# EAGLE board Soleful-v1.1 (EAGLE 7.7.0)
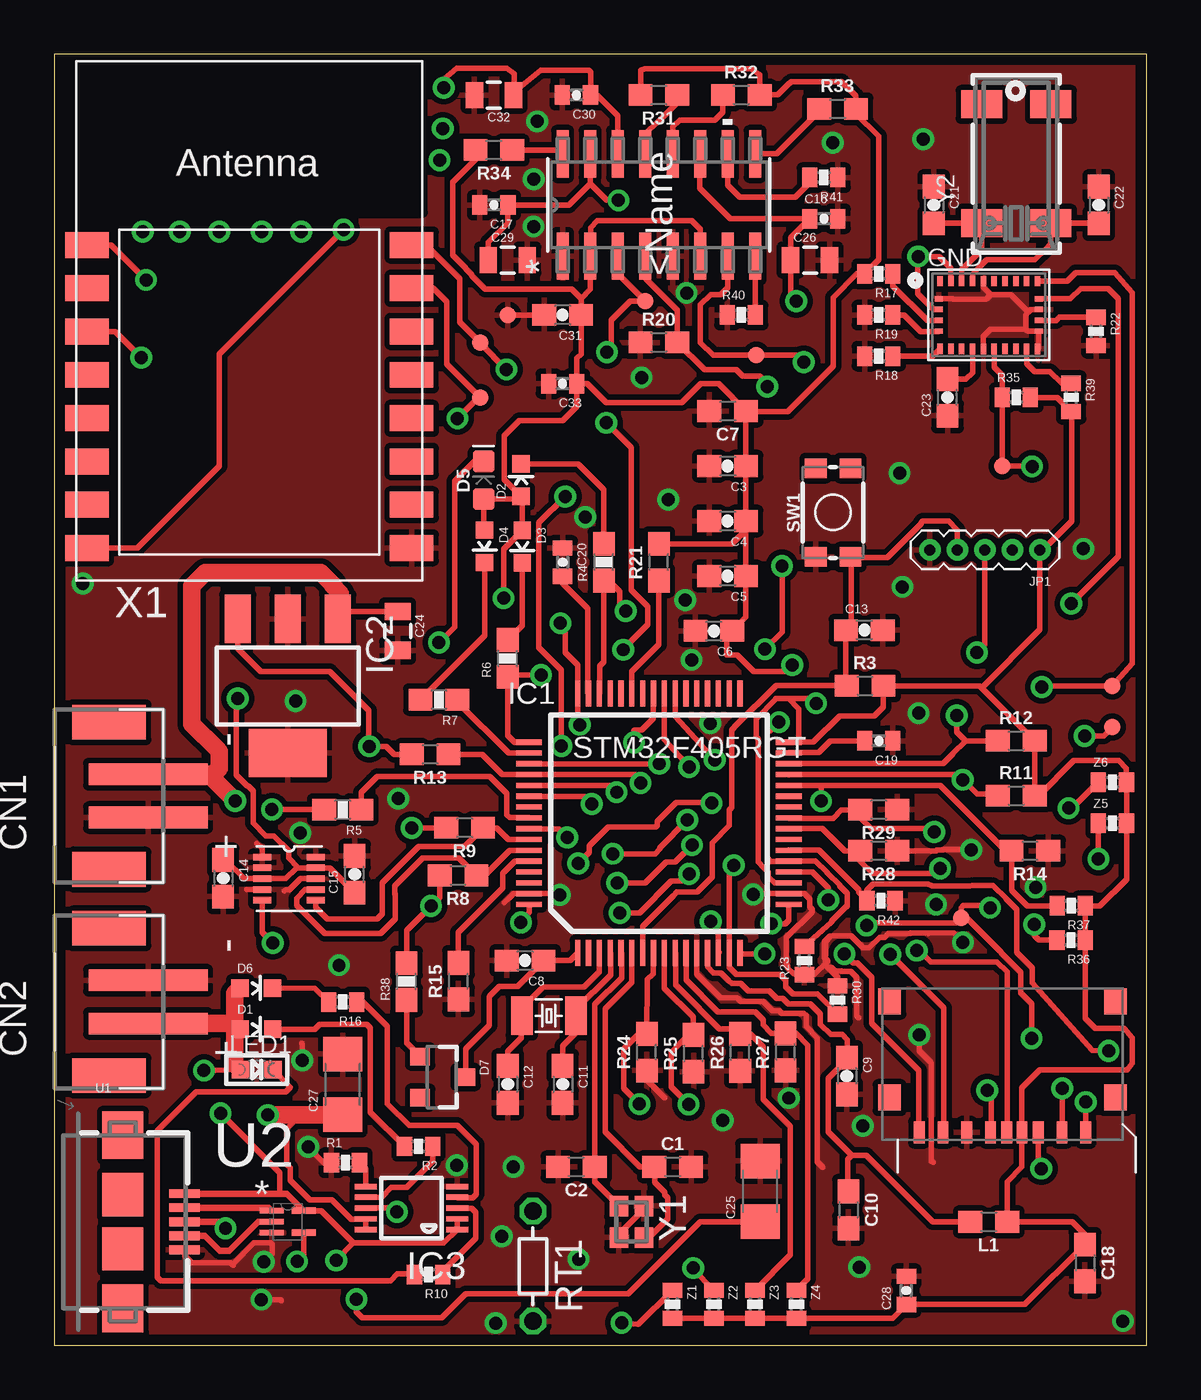
[diagram p0: board, top side]
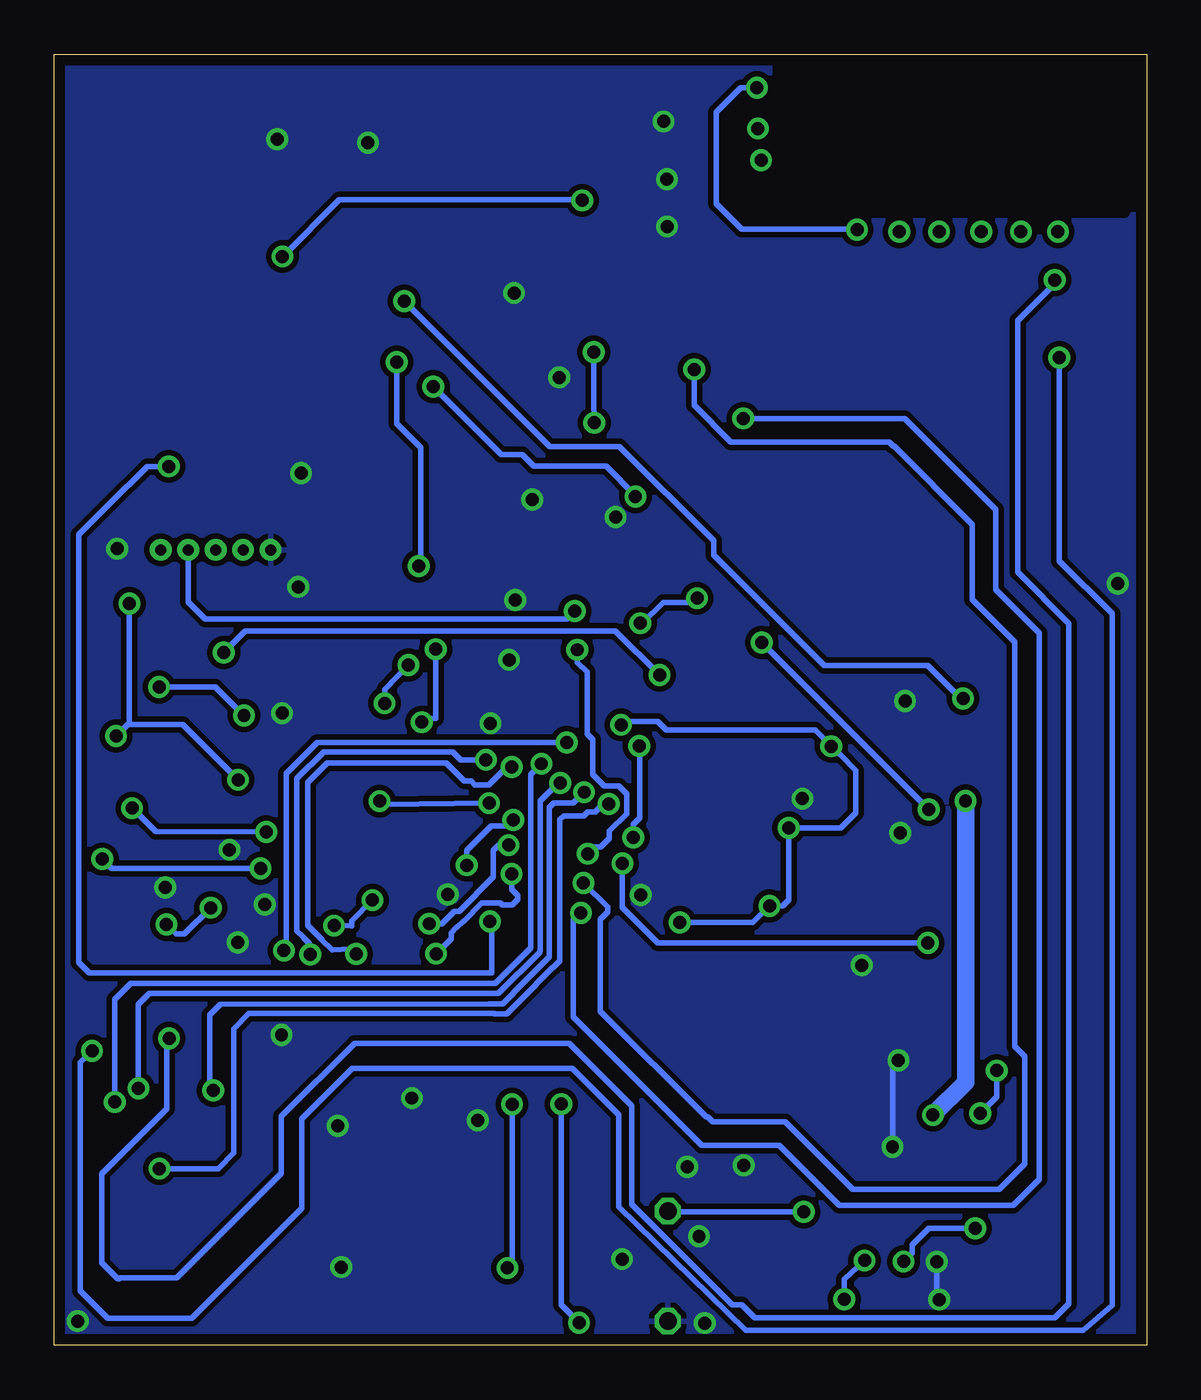
[diagram p1: board, bottom side, seen from below]

Size 50.47 x 59.68 mm. Coordinates in mm from the lower left corner, seen from the top.
Outline: 0,0 50.47,0 50.47,59.68 0,59.68 0,0
Copper layers (1*16): Top 0.0178mm / dielectric 59mil / Bottom 0.0178mm
Design rules "SSC-EAGLE-2Lyr_v1.0.0.3": minimum track width 6mil, minimum drill 14mil, track to track 6mil, track to pad 6mil, pad to pad 6mil, via to via 6mil, smd to smd 6mil, copper to edge 20mil, drill to drill 16mil, minimum pad ring 8mil, minimum via ring 8mil, stop-mask expansion 3mil, vias tented up to drill 0mil, thermal gap 10mil

## Footprints (pad centres in the part's own frame; a part is rotated, then mirrored left to right if it is on the bottom)
0603 = smd 1.1 x 1: 1 -0.85,0; 2 0.85,0
0603-CAP = smd 1.1 x 1: 1 -0.85,0; 2 0.85,0
0402-CAP = smd 0.7 x 0.9: 1 -0.65,0; 2 0.65,0
0805 = smd 0.8 x 1.2: 1 -0.9,0; 2 0.9,0
1206 = smd 1.6 x 1.8: 1 -1.4,0; 2 1.4,0
JST-PH-2-SMT = smd 1 x 5.5: 1 -1,-1.8; 2 1,-1.8 | smd 1.6 x 3.4: NC1 -3.4,0; NC2 3.4,0
LED-0603 = smd 0.8 x 0.8: A 0,-0.75; C 0,0.75
LED-0603@1 = smd 1 x 1: A -0.877,0; C 0.877,0
SOT23-3 = smd 0.8 x 0.9: 1 -0.95,-1; 2 0.95,-1; 3 0,1.1
BNO055 = smd 0.25 x 0.475: 1 -2.25,1.562; 6 -2.25,-1.562; 7 -1.75,-1.562; 8 -1.25,-1.562; 9 -0.75,-1.562; 10 -0.25,-1.562; 11 0.25,-1.562; 12 0.75,-1.562; 13 1.25,-1.562; 14 1.75,-1.562; 15 2.25,-1.562; 20 2.25,1.562; 21 1.75,1.562; 22 1.25,1.562; 23 0.75,1.562; 24 0.25,1.562; 25 -0.25,1.562; 26 -0.75,1.562; 27 -1.25,1.562; 28 -1.75,1.562 | smd 0.375 x 0.25: 2 -2.312,0.75; 3 -2.312,0.25; 4 -2.312,-0.25; 5 -2.312,-0.75; 16 2.312,-0.75; 17 2.312,-0.25; 18 2.312,0.25; 19 2.312,0.75
LQFP64 = smd 0.24 x 1.2: 1 -3.75,-6; 2 -3.25,-6; 3 -2.75,-6; 4 -2.25,-6; 5 -1.75,-6; 6 -1.25,-6; 7 -0.75,-6; 8 -0.25,-6; 9 0.25,-6; 10 0.75,-6; 11 1.25,-6; 12 1.75,-6; 13 2.25,-6; 14 2.75,-6; 15 3.25,-6; 16 3.75,-6; 33 3.75,6; 34 3.25,6; 35 2.75,6; 36 2.25,6; 37 1.75,6; 38 1.25,6; 39 0.75,6; 40 0.25,6; 41 -0.25,6; 42 -0.75,6; 43 -1.25,6; 44 -1.75,6; 45 -2.25,6; 46 -2.75,6; 47 -3.25,6; 48 -3.75,6 | smd 1.2 x 0.24: 17 6,-3.75; 18 6,-3.25; 19 6,-2.75; 20 6,-2.25; 21 6,-1.75; 22 6,-1.25; 23 6,-0.75; 24 6,-0.25; 25 6,0.25; 26 6,0.75; 27 6,1.25; 28 6,1.75; 29 6,2.25; 30 6,2.75; 31 6,3.25; 32 6,3.75; 49 -6,3.75; 50 -6,3.25; 51 -6,2.75; 52 -6,2.25; 53 -6,1.75; 54 -6,1.25; 55 -6,0.75; 56 -6,0.25; 57 -6,-0.25; 58 -6,-0.75; 59 -6,-1.25; 60 -6,-1.75; 61 -6,-2.25; 62 -6,-2.75; 63 -6,-3.25; 64 -6,-3.75
SOT223 = smd 1.219 x 2.235: 1 -2.311,-3.099; 2 0,-3.099; 3 2.311,-3.099 | smd 3.6 x 2.2: 4 0,3.099
MSOP10 = smd 0.25 x 1: 1 -1,-2.113; 2 -0.5,-2.113; 3 0,-2.113; 4 0.5,-2.113; 5 1,-2.113; 6 1,2.113; 7 0.5,2.113; 8 0,2.113; 9 -0.5,2.113; 10 -1,2.113
1X05-1.27MM = drill 0.508 pad 1: 1 0,0; 2 1.27,0; 3 2.54,0; 4 3.81,0; 5 5.08,0
CHIPLED_0603 = smd 0.8 x 0.8: A 0,-0.75; C 0,0.75
TXC-SMD-32X15 = smd 1 x 1.8: P$1 -1.25,0; P$2 1.25,0
0402-RES = smd 0.7 x 0.9: 1 -0.65,0; 2 0.65,0
0603-RES = smd 1.1 x 1: 1 -0.85,0; 2 0.85,0
R-5 = drill 0.813 octagon: 1 -2.54,0; 2 2.54,0
TACTILE_SWITCH_SMD_4.6X2.8MM = smd 0.9 x 1: 1 -2.05,-0.8; 2 2.05,-0.8; 3 2.05,0.8; 4 -2.05,0.8
PAD.03X.03 = smd 0.762 x 0.762: P$1 0,0
USB-AB-MICRO-SMD = smd 1.4 x 0.4: D+ 2.85,0; D- 2.85,0.65; GND 2.85,-1.3; ID 2.85,-0.65; VBUS 2.85,1.3 | smd 1.9 x 2: P$6 0,1.25; P$7 0,-1.25 | smd 1.9 x 2.2: P$8 0,4; P$9 0,-4
SOT50P160X60-5N = smd 1.118 x 0.254: 1 -0.737,0.508; 2 -0.737,0; 3 -0.737,-0.508 | smd 1.118 x 0.305: 4 0.737,-0.508; 5 0.737,0.508
DFN10 = smd 0.3 x 0.825: P$1 1,1.24; P$2 0.5,1.24; P$3 0,1.24; P$4 -0.5,1.24; P$5 -1,1.24; P$6 -1,-1.24; P$7 -0.5,-1.24; P$8 0,-1.24; P$9 0.5,-1.24; P$10 1,-1.24
MOLEX-SD-105027-PKG = smd 0.5 x 1: G$1 0.2,-6.66; P$1 3.85,-6.66; P$2 2.75,-6.66; P$3 1.65,-6.66; P$4 0.9,-6.66; P$5 -0.55,-6.66; P$6 -1.65,-6.66; P$7 -2.75,-6.66; P$8 -3.85,-6.66 | smd 1.05 x 1.2: M$1 5.225,-0.6; M$2 5.225,-5.05; M$3 -5.225,-0.6; M$4 -5.225,-5.05
D16 = smd 2.184 x 0.559: 1 -2.362,4.445; 2 -2.362,3.175; 3 -2.362,1.905; 4 -2.362,0.635; 5 -2.362,-0.635; 6 -2.362,-1.905; 7 -2.362,-3.175; 8 -2.362,-4.445; 9 2.362,-4.445; 10 2.362,-3.175; 11 2.362,-1.905; 12 2.362,-0.635; 13 2.362,0.635; 14 2.362,1.905; 15 2.362,3.175; 16 2.362,4.445
ESP-12 = smd 2 x 1.2: 1 -7.5,4.5; 2 -7.5,2.5; 3 -7.5,0.5; 4 -7.5,-1.5; 5 -7.5,-3.5; 6 -7.5,-5.5; 7 -7.5,-7.5; 8 -7.5,-9.5; 9 7.5,-9.5; 10 7.5,-7.5; 11 7.5,-5.5; 12 7.5,-3.5; 13 7.5,-1.5; 14 7.5,0.5; 15 7.5,2.5; 16 7.5,4.5
FA-128 = smd 0.95 x 0.85: 1 -0.725,-0.575; 2 0.725,-0.575; 3 0.725,0.575; 4 -0.725,0.575
CRYSTAL_8X3.8 = smd 1.3 x 1.9: P$1 -2.75,-1.6; P$2 2.75,-1.6; P$3 2.75,1.6; P$4 -2.75,1.6

## Placement (x,y rotation side)
C1  10pF  [0603]  28.57,8.26 0 top
C2  10pF  [0603]  24.13,8.26 180 top
C3  100nF  [0603-CAP]  31.11,40.64 180 top
C4  100nF  [0603-CAP]  31.11,38.1 180 top
C5  100nF  [0603-CAP]  31.11,35.56 180 top
C6  100nF  [0603-CAP]  30.48,33.02 180 top
C7  4.7uF  [0603]  31.11,43.18 180 top
C8  100nF  [0603-CAP]  21.76,17.79 180 top
C9  100nF  [0603-CAP]  36.62,12.45 270 top
C10  4.7uF  [0603]  36.69,6.27 270 top
C11  2.2pF  [0603-CAP]  23.5,12.06 270 top
C12  2.2pF  [0603-CAP]  20.95,12.06 270 top
C13  100nF  [0603-CAP]  37.43,33.06 0 top
C14  100nF  [0603-CAP]  7.81,21.59 270 top
C15  100nF  [0603-CAP]  13.88,21.77 90 top
C16  0.1uF  [0402-CAP]  35.56,52.07 0 top
C17  0.1uF  [0402-CAP]  20.32,52.7 180 top
C18  4.7uF  [0603]  47.62,3.81 270 top
C19  2.2uF  [0402-CAP]  38.1,27.94 180 top
C20  2.2uF  [0402-CAP]  23.5,36.2 270 top
C21  22pF  [0603-CAP]  40.64,52.7 270 top
C22  22pF  [0603-CAP]  48.26,52.7 270 top
C23  0.1uF  [0603-CAP]  41.27,43.81 90 top
C24  1uF  [0805]  15.88,33.02 270 top
C25  10uF  [1206]  32.62,7.12 90 top
C26  22uF  [0805]  34.92,50.16 0 top
C27  10uF  [1206]  13.34,12.06 90 top
C28  0.1uF  [0402-CAP]  39.37,2.54 90 top
C29  22uF  [0805]  20.95,50.16 0 top
C30  0.1uF  [0402-CAP]  24.13,57.78 180 top
C31  0.1uF  [0603-CAP]  23.5,47.62 180 top
C32  22uF  [0805]  20.32,57.78 180 top
C33  4.7uF  [0402-CAP]  23.5,44.45 180 top
CN1  To Battery  [JST-PH-2-SMT]  2.54,25.4 90 top
CN2  Ext Power  [JST-PH-2-SMT]  2.54,15.88 90 top
D1  RED  [LED-0603]  9.35,14.62 270 top
D2  RED  [LED-0603]  21.57,39.99 0 top
D3  GREEN  [LED-0603]  21.63,36.92 180 top
D4  LED-YELLOW  [LED-0603]  19.89,36.93 180 top
D5  LED-BLUE  [LED-0603@1]  19.84,39.98 90 top
D6  GREEN  [LED-0603]  9.35,16.52 270 top
D7  [SOT23-3]  17.91,12.4 270 top
FRAME1  FRAME-LEDGER  [CREATIVE_COMMONS]  -101.6,43.18 0 top  (outside the outline)
GND  BNO055  [BNO055]  43.18,47.62 0 top
IC1  STM32F405RGT  [LQFP64]  27.94,24.13 0 top
IC2  LT1129-3.3  [SOT223]  10.79,30.48 180 top
IC3  MCP73833-UN  [MSOP10]  16.51,6.35 90 top
JP1  [1X05-1.27MM]  45.55,36.77 180 top
L1  33nH/±5%/500mA  [0603]  43.18,5.71 180 top
LED1  [CHIPLED_0603]  9.36,12.75 270 top
Q4  32.768kHz  [TXC-SMD-32X15]  22.86,15.24 0 top
R1  10k  [0402-RES]  13.46,8.44 0 top
R2  1k  [0402-RES]  16.84,9.2 180 top
R3  4.7k  [0603]  37.47,30.48 0 top
R4  560  [0603-RES]  25.4,36.2 90 top
R5  220  [0603-RES]  13.34,24.77 180 top
R6  560  [0603-RES]  20.95,31.75 90 top
R7  560  [0603-RES]  17.78,29.84 180 top
R8  4.7k  [0603]  18.66,21.72 180 top
R9  4.7k  [0603]  18.97,23.92 180 top
R10  1k  [0402-RES]  17.3,3.27 180 top
R11  4.7k  [0603]  44.45,25.4 0 top
R12  4.7k  [0603]  44.45,27.94 0 top
R13  100k  [0603]  17.37,27.32 180 top
R14  100k  [0603]  45.09,22.86 180 top
R15  100k  [0603]  18.68,16.83 90 top
R16  1k  [0402-RES]  13.34,15.88 180 top
R17  10k  [0402-RES]  38.1,49.53 180 top
R18  10k  [0402-RES]  38.1,45.72 180 top
R19  10k  [0402-RES]  38.1,47.62 180 top
R20  100k  [0603]  27.94,46.35 0 top
R21  100k  [0603]  27.94,36.2 90 top
R22  10k  [0402-RES]  48.14,46.86 270 top
R23  10k  [0402-RES]  34.66,17.79 90 top
R24  10k  [0603]  27.38,13.55 90 top
R25  10k  [0603]  29.55,13.5 90 top
R26  10k  [0603]  31.7,13.54 90 top
R27  10k  [0603]  33.8,13.57 90 top
R28  10k  [0603]  38.1,22.86 180 top
R29  10k  [0603]  38.1,24.77 180 top
R30  10k  [0402-RES]  36.2,15.96 270 top
R31  4.7k  [0603]  27.94,57.78 180 top
R32  4.7k  [0603]  31.75,57.78 0 top
R33  4.7k  [0603]  36.2,57.15 0 top
R34  4.7k  [0603]  20.32,55.24 180 top
R35  10k  [0402-RES]  44.45,43.81 0 top
R36  10k  [0402-RES]  46.98,18.73 180 top
R37  10k  [0402-RES]  46.99,20.32 180 top
R38  220  [0603-RES]  16.28,16.82 90 top
R39  10k  [0402-RES]  46.99,43.81 270 top
R40  10k  [0402-RES]  31.75,47.62 0 top
R41  10k  [0402-RES]  35.56,53.98 180 top
R42  10k  [0402-RES]  38.2,20.55 180 top
RT1  10k  [R-5]  22.12,3.66 270 top
SW1  RST  [TACTILE_SWITCH_SMD_4.6X2.8MM]  35.99,38.49 90 top
TP1  TEST-POINT3  [PAD.03X.03]  19.68,43.81 0 top
TP2  TEST-POINT3  [PAD.03X.03]  19.68,46.35 0 top
TP3  TEST-POINT3  [PAD.03X.03]  48.9,30.48 0 top
TP4  TEST-POINT3  [PAD.03X.03]  48.9,28.57 0 top
TP5  TEST-POINT3  [PAD.03X.03]  20.95,47.62 0 top
TP6  TEST-POINT3  [PAD.03X.03]  41.9,19.76 0 top
TP7  TEST-POINT3  [PAD.03X.03]  43.81,40.64 0 top
TP8  TEST-POINT3  [PAD.03X.03]  27.3,48.26 0 top
TP9  TEST-POINT3  [PAD.03X.03]  32.44,45.76 0 top
U1  USB Power  [USB-AB-MICRO-SMD]  3.17,5.71 0 top
U2  TPD3E001DRLR  [SOT50P160X60-5N]  10.79,5.71 0 top
U$1  MMA7660  [DFN10]  10.86,21.57 90 top
U$9  MOLEX-SD-105027  [MOLEX-SD-105027-PKG]  43.81,16.51 0 top
U$18  TPS2054BDR  [D16]  27.94,52.7 90 top
X1  [ESP-12]  9.02,46.35 0 top
Y1  12 MHz  [FA-128]  26.67,5.71 270 top
Y2  32.768kHz  [CRYSTAL_8X3.8]  44.45,54.61 90 top
Z1  [0402-RES]  28.57,1.91 270 top
Z2  [0402-RES]  30.48,1.91 270 top
Z3  [0402-RES]  32.38,1.91 270 top
Z4  [0402-RES]  34.29,1.91 270 top
Z5  [0402-RES]  48.9,24.13 0 top
Z6  [0402-RES]  48.9,26.04 0 top

## Library data of the parts
C1 C2 = SparkFun-Capacitors; PROD_ID: CAP-11812
C3-C6 C8 C9 C11-C15 C21-C23 C31 = SparkFun-Capacitors
C7 C10 C18 C33 = SparkFun-Capacitors; PROD_ID: CAP-08280
C16 C17 C28 C30 = SparkFun-Capacitors; PROD_ID: CAP-00810
C19 C20 = SparkFun-Retired; PROD_ID: CAP-07888
C24 = SparkFun-Capacitors; PROD_ID: CAP-08064
C25 C27 = SparkFun-Capacitors; PROD_ID: CAP-10057
C26 C29 C32 = SparkFun-Capacitors; PROD_ID: CAP-08402
CN1 CN2 IC3 X1 = adafruit
D1 D2 = SparkFun-LED; PROD_ID: DIO-00819
D3 D6 = SparkFun-LED; PROD_ID: DIO-00821
D4 = SparkFun-LED; PROD_ID: DIO-09003
D5 = SparkFun-LED; PROD_ID: DIO-08575
D7 = SparkFun
FRAME1 = SparkFun-Aesthetics
GND LED1 Y2 = microbuilder
IC1 Q4 U$1 U$9 = pyboard
IC2 = linear-technology; MPN: LT1129CST-5#PBF; OC_FARNELL: 1663375; OC_NEWARK: 57M2069
JP1 = ModernDevice#1
L1 = SparkFun-Coils; PROD_ID: NDUC-07874
R1 R17-R19 R22-R30 R35-R37 R39-R42 = SparkFun-Resistors; PROD_ID: RES-00824
R2 R10 R16 = SparkFun-Resistors; PROD_ID: RES-07856
R3 R8 R9 R11 R12 R31-R34 = SparkFun-Resistors; PROD_ID: RES-07857
R4-R7 = SparkFun-Resistors
R13-R15 R20 R21 = SparkFun-Resistors; PROD_ID: RES-07828
R38 = SparkFun-Resistors; PROD_ID: RES-07866
RT1 = varistor
SW1 = SparkFun-Switches; PROD_ID: SWCH-13065
TP1-TP9 = MD-Passives
U1 = SparkFun-Connectors
U2 = Texas Instruments_By_element14_Batch_1; MPN: TPD3E001DRLR; OC_FARNELL: 1603422; OC_NEWARK: 41M5842; PACKAGE: SOT-5; SUPPLIER: Texas Instruments
U$18 = tps; 3D_LIBRARY_NAME: TI_AllParts_20121225; COPYRIGHT: Copyright C 2015 Accelerated Designs. All rights reserved; DATASHEETURL: httpwww.ti.comlitgpnTPS2054B; DESCRIPTION: Quad CurrentLimited PowerDistribution Switches; FAMILY_NAME: USB POWER SWITCH; GENERIC_PART_NUMBER: TPS2054B; INDUSTRY_STD_PKG_TYPE: SOIC; MANUFACTURER: Texas Instruments; MANUFACTURER_PART_NUMBER: TPS2054BDR; PACKAGE_DESIGNATOR: D; PIN_COUNT: 16; VENDOR: Texas Instruments
Y1 = crystal
Z1-Z6 = SparkFun-DiscreteSemi

## Nets
3V3: C3.1 C4.1 C5.1 C6.1 C7.1 C18.1 C28.1 C31.1 C33.1 D2.A D3.A D4.A D5.A IC1.19 IC1.32 IC1.48 IC1.64 IC2.3 JP1.1 L1.1 R3.2 R8.2 R9.2 R11.2 R12.2 R13.2 R17.2 R21.2 R31.2 R32.2 R33.2 R34.2 R35.2 R36.1 R37.1 R38.2 R39.2 U$9.P$4 U$18.2 U$18.6 Z1.2 Z2.2 Z3.2 Z4.2 Z5.2 Z6.2
A3V3: C9.1 C10.1 IC1.13 L1.2
ADC-FSR1: IC1.8 R24.2 Z1.1
ADC-FSR2: IC1.9 R25.2 Z2.1
ADC-FSR3: IC1.10 R26.2 Z3.1
ADC-FSR4: IC1.11 R27.2 Z4.1
ADC-FSR5: IC1.24 R28.2 Z5.1
ADC-FSR6: IC1.25 R29.2 Z6.1
BOOT0-P1: IC1.60 R15.2
BOOTLOAD-IMU: GND.4 R17.1
EN-WIFI: IC1.22 R42.2 X1.3
GND: C1.2 C2.2 C3.2 C4.2 C5.2 C6.2 C7.2 C8.2 C9.2 C10.2 C11.2 C12.2 C13.2 C14.2 C15.2 C16.2 C17.2 C18.2 C19.1 C20.1 C21.1 C22.1 C23.1 C24.2 C25.2 C26.2 C27.2 C28.2 C29.2 C30.2 C31.2 C32.2 C33.2 CN1.1 CN2.2 GND.2 GND.10 GND.15 GND.16 GND.18 GND.25 IC1.12 IC1.18 IC1.63 IC2.2 IC2.4 IC3.5 JP1.5 R1.1 R14.1 R15.1 R18.2 R19.2 R20.1 R22.2 R23.1 R24.1 R25.1 R26.1 R27.1 R28.1 R29.1 R30.1 R40.1 R41.1 R42.1 RT1.2 SW1.4 TP5.P$1 U1.GND U2.3 U$1.P$1 U$1.P$2 U$1.P$4 U$1.P$8 U$1.P$10 U$9.P$6 U$18.1 U$18.5 X1.9 Y1.2 Y1.4
I2CADDR_3V: GND.17 R22.1
INT_3V: GND.14 R39.1
N1: C12.1 IC1.3 Q4.P$1
N2: C11.1 IC1.4 Q4.P$2
N3: C2.1 IC1.5 Y1.1
N4: C1.1 IC1.6 Y1.3
N$3: D2.C R4.2
N$4: D3.C R6.2
N$5: D4.C R7.2
N$6: D5.C R5.2
N$7: D7.1 R38.1
N$8: IC3.6 R1.2
N$9: IC3.7 R2.1
N$10: D1.C R2.2
N$11: IC3.8 RT1.1
N$12: IC3.3 R10.1
N$13: IC3.4 R16.1
N$14: D6.C R16.2
N$15: LED1.C R10.2
N$16: R41.2 U$18.10
N$17: R34.1 U$18.16
N$18: R31.1 U$18.13
N$20: R32.1 U$18.12
N$21: R33.1 U$18.9
N$24: R40.2 U$18.8
N$26: U1.D- U2.1
N$27: U1.D+ U2.4
N$29: U1.ID U2.2
N$55: C21.2 GND.27 Y2.P$4
N$56: C22.2 GND.26 Y2.P$1
N$57: C23.2 GND.9
PA7-X8: IC1.23
PA8-SDIO_SW: IC1.41 U$9.G$1
PA9-VBUS: IC1.42
PA10-ID: IC1.43 R21.1
PA11-DM: IC1.44
PA12-DP: IC1.45
PA13-RED-SWDIO-P5: IC1.46 JP1.2 R4.1
PA14-GRN-SWDCLK-P4: IC1.49 JP1.3 R6.1
PA15-YEL-P3: IC1.50 R7.1
PB0-Y11: IC1.26
PB1-Y12: IC1.27
PB2-BOOT1-MMA-INT: IC1.28 R14.2 R37.2 U$1.P$5
PB3-X17: IC1.55
PB4-BLU-P2: IC1.56 R5.1
PB6-SCL-X9: IC1.58 R9.1 U$1.P$6
PB7-SDA-X10: IC1.59 R8.1 U$1.P$7
PB8-Y3: IC1.61
PB9-Y4: IC1.62
PB12-Y5: IC1.33
PB13-Y6: IC1.34
PB14-Y7: IC1.35
PB15-Y8: IC1.36
PC6-Y1: IC1.37
PC7-Y2: IC1.38
PC8-SDIO_D0: IC1.39 U$9.P$7
PC9-SDIO_D1: IC1.40 U$9.P$8
PC10-SDIO_D2: IC1.51 U$9.P$1
PC11-SDIO_D3: IC1.52 R13.1 U$9.P$2
PC12-SDIO_CK: IC1.53 U$9.P$5
PC13-X18: IC1.2
PD2-SDIO_CMD: IC1.54 U$9.P$3
PS0_3V: GND.6 R18.1
PS1_3V: GND.5 R19.1
PWR-IMU: IC1.15 R30.2 TP8.P$1 U$18.3
PWR-MMA: IC1.57 R20.2 U$18.4
PWR-WIFI: IC1.21 R23.2 TP9.P$1 U$18.7
RST#: C13.1 IC1.7 JP1.4 R3.1 SW1.1
RST-IMU: GND.11 IC1.14 R35.1 TP7.P$1
RST-WIFI: IC1.20 R36.2 TP6.P$1 X1.1
RX-WIFI: IC1.17 TP2.P$1 X1.16
SCL-IMU: GND.19 IC1.29 R11.1 TP4.P$1
SDA-IMU: GND.20 IC1.30 R12.1 TP3.P$1
TX-WIFI: IC1.16 TP1.P$1 X1.15
V+: C24.1 C27.1 CN1.2 IC2.1 IC3.9 IC3.10
VBACKUP: C8.1 D7.3 IC1.1
VCAP1: C19.2 IC1.31
VCAP2: C20.2 IC1.47
VCC-WIFI: C30.1 C32.1 U$18.14 X1.8
VDD-IMU: C17.1 C29.1 GND.3 GND.28 U$18.15
VDD-MMA: C14.1 C15.1 C16.1 C26.1 U$1.P$3 U$1.P$9 U$18.11
VUSB: C25.1 CN2.1 D1.A D6.A IC3.1 IC3.2 LED1.A U1.VBUS U2.5

## Tracks (layer width: path | path; a pad name or v marks a point on that pad's centre or on a via)
3V3  (via drill 0.6, 0.6 pad 0.25)
  Top 0.254: R35.2 46.34,43.81 R39.2 47,43.15 47,38.11 45.66,36.77 JP1.1 45.55,33.09 42.85,30.39 | 34.53,27.88 35.07,27.88 36.29,29.09 37.9,29.09 38.31,29.51 R3.2 42.76,30.48 42.85,30.39 | 34.53,27.88 IC1.32 33.92,27.86 | 42.85,30.39 R12.2 R11.2 45.49,25.4 47.11,27.02 49.17,27.02 49.53,26.67 49.53,26.05 Z6.2 Z5.2 49.55,21.54 48.31,20.3 47.66,20.3 R37.1 R36.1 47.63,15.12 48.1,14.66 49.43,14.66 49.81,14.21 49.81,13.03 49.59,12.73 45.53,12.73 44.72,11.91 U$9.P$4 44.71,8.24 44.03,7.56 L1.1 47.05,5.72 47.62,5.14 C18.1 44.85,1.89 C28.1 38.73,1.25 Z4.2 Z3.2 Z2.2 Z1.2 | R31.2 27.1,57.8 27.1,58.94 27.3,59 32.19,59 32.6,58.73 R32.2 32.61,57.79 33.42,57.79 33.95,58.33 33.98,58.33 34.05,58.4 36.39,58.4 37.05,57.75 R33.2 37.05,56.94 38.1,55.88 38.1,50.18 R17.2 37.09,49.53 35.98,48.42 35.98,45.25 33.9,43.16 31.98,43.16 C7.1 | 24.34,48.39 C31.1 24.35,45.82 24.14,45.62 C33.1 | 24.34,48.39 24.77,48.81 U$18.2 24.78,50.36 24.78,51.66 25.1,51.98 29.46,51.98 29.84,51.59 U$18.6 | C7.1 C3.1 C4.1 | C4.1 C5.1 31.96,33.66 C6.1 31.09,32.78 31.09,31.91 31.56,31.91 32.32,31.16 33.81,31.16 v34.1,31.45 | C4.1 31.96,37.69 31.31,37.03 27.95,37.03 R21.2 | IC2.3 8.48,32.2 9.55,31.14 12.74,31.14 14.53,29.34 14.53,27.71 v14.56,27.69 15.35,27.69 15.71,27.32 R13.2 | R34.2 19.47,54.81 18.66,54 | 18.66,54 | 18.66,54 18.41,53.75 18.41,50.39 19.01,49.79 19.01,49.77 19.3,49.48 19.3,49.44 19.92,48.82 23.91,48.82 24.34,48.39 | C7.1 30.7,44.45 29.88,44.45 29,43.57 25.51,43.57 24.62,44.45 C33.1 | D2.A 21.43,39.11 D5.A 19.84,37.73 D4.A | D2.A 21.63,39.19 D3.A 20.76,36.8 v20.76,34.53 | v16.52,23.92 17.31,23.91 R9.2
  Top 0.254: R8.2 17.81,20.71 v17.41,20.31 16.28,19.18 R38.2 | IC1.64 | IC1.64 21.94,20.01 v21.57,19.54 | 33.94,29.89 33.35,29.89 33.35,29.87 32.43,28.96 32.43,28.12 32.52,28.03 32.52,22.34 32.8,22.07 | 33.94,29.89 34.41,29.42 34.41,28 34.53,27.88 | 33.94,29.89 34.78,29.89 v35.2,29.67 | IC1.48 | C33.1 24.14,43.4 23.5,42.75 21.5,42.75 20.79,42.04 20.79,40.02 D2.A | v23.39,33.38 23.61,33.15 23.61,32.02 24.19,31.45 IC1.48 | v24.28,28.68 24.28,29.11 24.18,29.2 IC1.48 | IC1.19 | C33.1 | IC1.19 | 32.8,22.07 | 32.8,22.07 32.99,21.88 32.99,21.66 33.29,21.36 33.92,21.36 IC1.19
  Bottom 0.254: v21.57,19.54 18.18,19.54 v17.41,20.31 16.8,20.31 16.53,20.58 16.53,23.91 v16.52,23.92 14.12,23.92 13.43,24.61 13.43,26.58 14.15,27.3 14.17,27.3 v14.56,27.69 15.31,28.44 22.18,28.44 22.59,28.84 24.12,28.84 v24.28,28.68 | v35.2,29.67 35.2,30.32 v34.1,31.45 | v23.39,33.38 23.3,33.38 22.33,34.34 20.96,34.34 v20.76,34.53
A3V3
  Top 0.254: L1.2 40.59,5.71 37.52,8.78 36.86,8.78 | 36.86,8.78 36.68,8.6 36.68,7.14 C10.1 | IC1.13 30.19,17.5 30.46,17.22 30.8,17.22 31.16,16.86 31.18,16.86 31.31,16.73 31.72,16.73 32.07,16.37 33.04,16.37 33.38,16.04 33.67,16.04 33.92,15.79 34.93,15.79 35.4,15.32 35.4,14.85 35.89,14.36 36.41,14.36 36.65,14.13 36.65,13.33 C9.1 36.62,13.19 35.77,12.34 35.77,9.87 36.86,8.78
ADC-FSR1  (via drill 0.6)
  Top 0.254: IC1.8 27.68,17.18 27.41,16.91 R24.2 27.02,14.4 26.31,13.7 26.31,11.88 v27.04,11.15 | v26.22,1.04 26.99,0.97 Z1.1
  Bottom 0.254: v27.04,11.15 27.04,1.87 v26.22,1.04
ADC-FSR2  (via drill 0.6)
  Top 0.254: IC1.9 28.2,16.5 29.52,15.18 R25.2 29.3,14.35 28.5,13.55 28.5,11.95 v29.31,11.15 | v29.53,3.58 29.53,3.51 Z2.1
  Bottom 0.254: v29.31,11.15 29.31,3.79 v29.53,3.58
ADC-FSR3
  Top 0.254: IC1.10 28.71,18.11 28.71,16.66 29.82,15.55 29.82,15.54 30.72,14.64 31.46,14.64 R26.2 32.15,14.39 32.76,13.79 32.76,11.38 34.01,10.12 34.01,4.18 Z3.1
ADC-FSR4
  Top 0.254: R27.2 33.6,14.42 | IC1.11 29.2,18.12 29.2,16.89 30.67,15.42 32.38,15.42 32.76,15.05 32.76,14.81 33.14,14.43 33.79,14.43 R27.2 | R27.2 34.28,14.42 34.83,13.87 34.83,3.09 Z4.1
ADC-FSR5  (via drill 0.6 pad 0.25)
  Top 0.254: IC1.24 35.49,23.89 36.52,22.86 R28.2 37.25,22.37 37.82,21.8 40.69,21.8 v40.93,22.04 | v48.25,22.48 Z5.1
  Bottom 0.254: v40.93,22.04 47.81,22.04 v48.25,22.48
ADC-FSR6  (via drill 0.6 pad 0.25)
  Top 0.254: IC1.25 33.96,24.36 35.99,24.36 36.38,24.75 37.23,24.75 R29.2 37.25,24.38 37.75,23.88 40.63,23.88 v40.66,23.73 | v46.87,24.83 47.04,24.83 Z6.1
  Bottom 0.254: v40.66,23.73 45.78,23.74 v46.87,24.83
BOOT0-P1
  Top 0.254: R15.2 18.68,19.09 20.73,21.14 20.73,21.82 21.3,22.39 21.93,22.39 IC1.60
BOOTLOAD-IMU
  Top 0.254: R17.1 38.75,48.96 40.35,47.36 40.85,47.36 GND.4
EN-WIFI  (via drill 0.6)
  Top 0.254: IC1.22 35.33,22.89 37.17,21.05 37.17,20.93 R42.2 37.55,21.03 37.85,21.33 40.37,21.33 40.57,21.23 42.29,21.23 42.43,21.26 43.37,21.26 43.38,21.26 43.98,20.65 43.98,20.63 44.47,20.14 44.47,18.16 45.19,17.45 45.19,16.75 47.96,13.63 v48.72,13.62 | X1.3 2.82,46.85 v4.03,45.65
  Bottom 0.254: v4.03,45.65 4.03,36.25 1.59,33.81 1.59,1.86 2.93,0.69 18.5,0.69 24.39,6.4 24.39,10.65 26.54,12.8 36.7,12.8 39.03,10.47 39.03,6.34 44.11,1.26 47.99,1.26 49.25,2.51 49.25,13.08 v48.72,13.62 49.05,13.28
GND  (via drill 0.6, 0.6 pad 0.25)
  Top 0.254: C31.2 TP5.P$1 | U$1.P$1 9.62,22.97 9.37,23.21 | U$1.P$4 8.9,21.07 | Y1.2 26.09,5.14 26.79,5.83 26.96,6.01 26.96,6.16 Y1.4 | GND.2 41.51,48.38 41.52,48.36 43.07,48.36 43.27,48.57 | GND.18 45.13,47.88 45.01,47.76 | 45.01,47.76 44.88,47.63 44.88,46.97 | 44.88,46.97 44.98,46.87 GND.16 | GND.16 | GND.16 45.49,46.12 GND.15 | 44.88,46.97 43.27,46.97 42.93,46.62 GND.10 | GND.25 42.93,48.91 43.27,48.57 | 43.27,48.57 44.21,48.57 45.01,47.76 | U1.GND 6.03,4.13 6.35,3.81 8.16,3.81 8.27,3.7 8.27,3.78 9.22,4.73 10.02,4.73 10.08,4.67 10.08,4.26 v9.69,3.86 | v9.58,2.12 10.45,2.12 10.5,2.05 | R1.1 12.47,8.44 v11.74,9.18 | v11.46,13.17 11.46,13.94 11.43,13.97 | v23.36,20.82 23.3,20.88 IC1.63 21.23,20.88 21.01,20.67 21,20.67 20.8,20.48 | U$1.P$8 11.39,21.57 10.87,21.05 10.69,21.05 10.63,20.99 | 35.73,18.79 35.59,18.65 35.59,17.92 35.74,17.78 35.74,17.76 35.12,17.14 R23.1 34.61,17.19 34.14,17.19 33.9,17.43 33.9,17.54 33.83,17.61 33.83,18.86 35.02,20.04 35.02,20.15 34.9,20.26 34.9,20.63 34.65,20.88 IC1.18 32.32,20.88 v32.29,20.85 32.2,20.94 | 35.73,18.79 | 35.73,18.79 35.87,18.93 | 35.87,18.93 36.82,18.93 37.38,18.37 37.65,18.37 38.13,18.86 38.37,18.86 38.55,19.04 39.55,19.04 39.57,19.05 40.38,19.05 | 40.38,19.05 | R28.1 40.76,22.86 40.78,22.89 41.08,22.89 41.12,22.93 42.35,22.93 v42.37,22.91 | v39.97,14.36 39.97,13.62 40.53,13.05 40.53,10.71 40.53,10.69 40.53,8.51 40.61,8.46 | 35.87,18.93 35.87,18.88 35.64,18.65 35.64,18.05 35.62,18.03 35.62,17.6 35.75,17.47 35.9,17.47 36.07,17.3 36.36,17.3 36.38,17.29 36.8,17.29 37.07,17.01 37.07,15.23 37.17,15.13 | 40.38,19.05 41.56,19.05 v41.99,18.62
  Top 0.254: 35.52,8.23 35.27,8.48 35.27,14.21 34.74,14.73 34.74,15.24 34.64,15.34 33.63,15.34 33.51,15.46 33.21,15.46 32.77,15.9 31.71,15.9 31.55,16.06 30.79,16.06 29.69,17.16 IC1.12 | R30.1 36.2,17.01 35.63,17.58 | R24.1 27.38,12.26 28.21,11.43
  Bottom 0.254: v9.69,3.86 9.69,2.1 v9.58,2.12 | v11.74,9.18 11.74,12.9 v11.46,13.17
  other vias: 39.19,35.06 39.06,40.32 37.2,3.62 49.38,1.12 22.32,56.57 22.16,53.9 1.32,35.22 24.23,3.99 30.89,10.4 28.38,39.1 24.53,38.28 37.36,10.15 39.94,29.22 35.97,55.59 40.16,55.74 47.56,36.82 22.15,51.71 29.22,48.64 30.31,28.75 29.45,31.68 29.16,34.45 21.22,8.25 18.61,8.33 40.74,20.39 45.34,21.17 20.41,1.03 20.68,5.04 11.37,23.69 15.9,25.27 13.16,17.57 27.14,44.73 11.15,29.78 33.94,11.43
  pour Top (isolate 0.254): 0,0 0,52.23 17.2,52.23 17.2,59.66 50.47,59.66 50.47,59.68 50.47,59.68 50.47,0
  pour Bottom (isolate 0.254): 0,0 0,52.25 17.14,52.25 17.14,52.35 17.15,52.35 17.15,59.68 50.47,59.68 50.47,0 0,0
I2CADDR_3V
  Top 0.254: R22.1 46.45,47.51 46.3,47.37 GND.17
INT_3V
  Top 0.254: R39.1 46.55,44.47 46,45.01 45.31,45.01 44.93,45.38 GND.14
N1
  Top 0.254: C12.1 20.95,13.59 21.57,14.2 21.57,15.2 Q4.P$1 21.61,15.57 22.61,16.57 24.49,16.57 25.18,17.26 IC1.3
N2
  Top 0.254: C11.1 23.5,13.85 24.12,14.47 Q4.P$2 24.11,15.52 25.71,17.12 25.71,18.11 IC1.4
N3
  Top 0.254: Y1.1 24.98,7.55 C2.1 24.98,15.76 26.21,16.99 26.21,18.11 IC1.5
N4
  Top 0.254: Y1.3 27.49,4.99 28.35,5.85 28.35,6.82 28.21,6.96 28.21,7.07 27.74,7.53 27.74,8.24 C1.1 27.07,8.26 25.46,9.86 25.46,15.54 26.7,16.78 IC1.6
N$3
  Top 0.254: R4.2 25.4,39.55 24.23,40.73 21.59,40.73 D2.C
N$4
  Top 0.254: D3.C 21.63,33.27 R6.2
N$5
  Top 0.254: D4.C 19.89,32.8 R7.2
N$6  (via drill 0.6 pad 0.25)
  Top 0.254: D5.C 19.43,40.86 18.5,39.94 18.5,33.21 v17.78,32.49 | v10.06,24.77 R5.2
  Bottom 0.254: v17.78,32.49 v10.06,24.77
N$7
  Top 0.254: R38.1 16.28,13.98 D7.1
N$8
  Top 0.254: IC3.6 14.4,8.16 R1.2
N$9
  Top 0.254: R2.1 17.5,8.52 16.28,7.3 15.58,7.3 15.13,6.85 IC3.7
N$10
  Top 0.254: D1.C 12.04,14.61 12.28,14.84 14.44,14.84 14.62,14.67 14.62,10.77 R2.2
N$11  (via drill 0.6)
  Top 0.254: IC3.8 15.67,6.35 v15.84,6.18
  Bottom 0.254: v15.84,6.18 22.1,6.18 RT1.1
N$12
  Top 0.254: R10.1 17.95,3.42 19.49,4.95 19.49,6.15 19.29,6.34 IC3.3
N$13
  Top 0.254: R16.1 14.25,15.88 15.39,14.74 15.39,11.17 16.4,10.16 18.63,10.16 19.5,9.28 19.5,6.98 19.35,6.83 18.64,6.83 IC3.4
N$14
  Top 0.254: D6.C 12.05,16.51 R16.2
N$15
  Top 0.254: LED1.C 10.91,11.93 10.71,11.72 6.56,11.72 4.75,9.91 4.75,3.16 4.92,2.99 15.54,2.99 15.86,3.3 16.62,3.3 R10.2
N$16
  Top 0.254: R41.2 34.91,53.74 34.23,53.06 31.68,53.06 31.11,53.63 U$18.10
N$17
  Top 0.254: R34.1 23.32,55.24 U$18.16
N$18
  Top 0.254: R31.1 28.79,57.44 27.87,56.52 27.84,56.52 27.37,56.04 27.37,55.13 U$18.13
N$19  (via drill 0.6)
  other vias: 4.09,51.47
N$20
  Top 0.254: R32.1 30.9,57 30.53,56.63 28.9,56.63 28.59,56.32 U$18.12
N$21
  Top 0.254: R33.1 35.34,57.04 33.38,55.08 U$18.9
N$22  (via drill 0.6)
  other vias: 5.8,51.47
N$23  (via drill 0.6)
  other vias: 7.63,51.47
N$24
  Top 0.254: R40.2 32.4,50.33 U$18.8
N$25  (via drill 0.6)
  other vias: 9.59,51.47
N$26
  Top 0.305: U1.D- 9.92,6.37 U2.1
N$27  (via drill 0.6 pad 0.25)
  Top 0.254: U2.4 11.53,4.18 v11.23,3.88
  Top 0.305: U1.D+ 7.62,5.71 v7.92,5.41
  Bottom 0.254: v7.93,5.41 10.06,5.41 10.83,4.65 10.83,4.28 v11.23,3.88
  Bottom 0.305: v7.92,5.41 v7.93,5.41
N$28  (via drill 0.6)
  other vias: 11.42,51.47
N$29
  Top 0.305: U1.ID 6.96,5.07 7.66,4.37 8.08,4.37 9.43,5.71 U2.2
N$30  (via drill 0.6)
  other vias: 17.95,56.24
N$32  (via drill 0.6)
  other vias: 17.81,54.78
N$55
  Top 0.254: C21.2 Y2.P$4 42.85,50.63 41.92,49.71 GND.27
N$56
  Top 0.254: C22.2 Y2.P$1 46.05,50.92 45.83,50.69 45.31,50.18 | 45.31,50.18 | GND.26 42.43,49.52 42.72,49.8 42.72,49.81 43.09,50.18 45.31,50.18
N$57
  Top 0.254: C23.2 42.12,44.66 42.43,44.97 GND.9
PA8-SDIO_SW  (via drill 0.6)
  Top 0.254: IC1.41 27.69,28.98 27.16,28.45 26.84,28.45 26.79,28.4 v26.79,27.86 | v39.85,18.25 39.84,18.38 40.49,17.73 43.56,17.73 44.03,17.25 44.03,9.87 U$9.G$1
  Bottom 0.254: v26.79,27.86 38.31,27.87 39.75,26.43 39.75,18.42 v39.85,18.25
PA10-ID
  Top 0.254: R21.1 27.94,32.96 27.94,32.39 26.7,31.15 IC1.43
PA13-RED-SWDIO-P5  (via drill 0.6)
  Top 0.254: IC1.46 25.21,30.15 25.21,31.39 25.4,31.58 R4.1 25.64,35.34 26.14,34.84 26.14,34.21 v26.41,33.94
  Bottom 0.254: JP1.2 44.27,34.36 43.48,33.57 26.77,33.57 v26.41,33.94
PA14-GRN-SWDCLK-P4  (via drill 0.6)
  Top 0.254: IC1.49 21.92,27.86 21.29,27.86 20.95,28.19 R6.1 21.03,30.98 v22.5,30.98 | JP1.3 43.01,32.4 v42.63,32.03
  Bottom 0.254: v42.63,32.03 41.64,33.03 24.55,33.03 v22.5,30.98
PA15-YEL-P3
  Top 0.254: R7.1 18.63,29.73 20.99,27.37 IC1.50
PB2-BOOT1-MMA-INT  (via drill 0.6)
  Top 0.254: R37.2 46.32,20.3 44.97,20.3 44.23,21.03 R14.2 43.97,22.86 40.94,25.88 35.39,25.88 | 35.39,25.88 IC1.28 | IC1.28 | U$1.P$5 9.62,19.09 v10.1,18.6 | v30.37,25.06 30.57,25.09 28.75,25.09 27.87,24.21 27.87,24.04 27.8,23.96 25.59,23.96 24.72,23.09 24.72,22.78 v24.21,22.28 | v35.43,25.16 35.44,25.83 35.39,25.88
  Bottom 0.254: v10.1,18.6 22.59,18.6 24.23,20.24 24.23,22.27 v24.21,22.28 | v30.37,25.06 35.22,25.01 v35.43,25.16
PB4-BLU-P2
  Top 0.254: R5.1 14.19,25.55 14.72,26.09 | 14.72,26.09 | 14.72,26.09 14.93,26.3 20.12,26.3 20.91,25.51 20.91,24.52 21.04,24.39 21.93,24.39 IC1.56
PB6-SCL-X9
  Top 0.254: IC1.58 21.93,23.39 20.99,23.39 20.46,23.92 R9.1 18.96,23.07 16.84,23.07 15.15,21.37 15.15,19.93 14.93,19.71 12.63,19.71 12.1,20.24 U$1.P$6
PB7-SDA-X10
  Top 0.254: IC1.59 21.04,22.87 19.89,21.72 R8.1 18.7,22.53 17.03,22.53 15.74,21.24 15.74,20.88 15.75,20.86 15.75,19.72 15.08,19.05 12.49,19.05 11.2,20.34 11.2,20.66 11.61,21.07 U$1.P$7
PC8-SDIO_D0  (via drill 0.6)
  Top 0.254: IC1.39 28.69,29.07 v30.52,27.06 | U$9.P$7 41.09,9.88 41.09,15.6 v38.63,18.06
  Bottom 0.254: v30.52,27.06 31.69,27.06 32.04,27.42 38.02,27.42 39.25,26.19 39.25,19.16 38.95,18.85 38.95,18.84 38.69,18.58 38.69,18.12 v38.63,18.06
PC9-SDIO_D1  (via drill 0.6)
  Top 0.254: IC1.40 28.19,28 v29.33,26.74 | U$9.P$8 39.94,9.88 39.94,12.72 37.78,14.88 37.78,17.01 37.11,17.69 36.92,17.69 v36.52,18.1
  Bottom 0.254: v29.33,26.74 29.56,26.74 30.38,25.91 31.03,25.91 31.21,26.09 31.53,26.09 32.36,26.92 37.85,26.92 38.75,26.02 38.75,19.41 38.1,18.75 | 38.1,18.75 | 38.1,18.75 37.62,18.27 36.76,18.34 v36.52,18.1
PC10-SDIO_D2  (via drill 0.6)
  Top 0.254: U$9.P$1 v47.66,11.24 v47.67,11.24 | v27.96,26.88 IC1.51
  Bottom 0.254: v47.67,11.24 47.67,15.98 46.92,16.73 30.09,16.73 28.45,18.36 28.45,26.39 v27.96,26.88
PC11-SDIO_D3  (via drill 0.6)
  Top 0.254: R13.1 19.77,27.3 20.7,26.38 IC1.52 26.83,26.39 27.02,26.2 v27.09,26 | U$9.P$2 46.56,11.02 v46.57,11.88
  Bottom 0.254: v46.57,11.88 46.58,15.76 46.08,16.26 29.95,16.26 28.04,18.17 28.04,18.22 28.01,18.24 28.01,25.17 27.18,26 v27.09,26
PC12-SDIO_CK  (via drill 0.6)
  Top 0.254: IC1.53 25.67,25.88 v25.98,25.57 | U$9.P$5 43.29,9.87 43.29,11.61 v43.11,11.79
  Bottom 0.254: v25.98,25.57 26.48,25.07 27.38,25.07 27.59,24.86 27.59,17.96 27.76,17.8 | v43.11,11.79 43.29,11.96 43.29,15.27 42.79,15.77 30.37,15.79 29.75,15.79 29.63,15.9 29.43,16.1 29.23,16.3 29.23,16.31 28.74,16.8 28.74,16.81 28.22,17.34 | 27.76,17.8 | 27.76,17.8 28.22,17.34 | 28.22,17.34
PD2-SDIO_CMD  (via drill 0.6)
  Top 0.254: IC1.54 24.49,25.38 v24.84,25.02 | U$9.P$3 45.48,9.84 45.48,8.3 v45.6,8.17
  Bottom 0.254: v24.84,25.02 25.11,25.02 25.48,24.66 25.82,24.66 26,24.48 26.93,24.48 27.1,24.31 27.1,17.77 27.41,17.46 27.43,17.46 28.96,15.93 29.24,15.64 29.55,15.33 30.13,15.33 30.14,15.34 41.48,15.34 42.18,14.64 42.18,8.89 42.9,8.17 45.41,8.17 v45.6,8.17
PS0_3V
  Top 0.254: R18.1 40.59,45.72 GND.6
PS1_3V
  Top 0.254: R19.1 39.27,47.62 40.03,46.86 40.86,46.86 GND.5
PWR-IMU  (via drill 0.6)
  Top 0.254: U$18.3 26.04,49.53 TP8.P$1 26.63,48.26 25.74,47.38 25.74,46.11 v25.54,45.91 | v29.25,24.29 27.99,23 27.99,22.94 27.76,22.71 25.82,22.71 v25.81,22.73 | IC1.15 | v26.3,32.15 26.49,32.34 26.49,32.39 27.43,33.33 27.43,34.15 26.67,34.9 26.67,41.48 v25.51,42.64 | IC1.15 31.19,17.48 31.52,17.15 33.52,17.15 33.8,16.86 33.8,16.57 34.14,16.24 35.27,16.24 R30.2 | IC1.15 31.19,21.98 v31.41,22.19
  Bottom 0.254: v25.54,45.91 25.54,43.74 v25.51,42.64 | v26.3,32.15 v26.29,32.14 26.29,31.57 25.85,31.13 25.85,28.26 25.58,27.99 25.58,26.38 25.06,25.86 24.38,25.86 24.02,25.5 24.02,24.57 24.82,23.77 24.82,23.44 25.21,23.05 25.49,23.05 v25.81,22.73 | v31.41,22.19 31.41,22.87 30.27,24 29.54,24 v29.25,24.29
PWR-MMA  (via drill 0.6)
  Top 0.254: U$18.4 27.33,50.31 27.33,49.3 28.79,47.84 R20.2 30.06,45.09 31.51,45.09 31.8,44.8 32.6,44.8 32.95,44.44 v32.95,44.31 | IC1.57 23.31,23.88 v23.71,23.48 | v23.44,27.71 23.43,31.22 22.39,32.25 22.39,38.02 v23.61,39.24
  Bottom 0.254: v23.71,23.48 23.71,24.08 23.41,24.37 23.41,27.57 v23.44,27.71 | v23.61,39.24 23.61,39.27 24.97,40.63 28.31,40.63 28.84,41.16 29.81,41.16 v32.95,44.31
PWR-WIFI  (via drill 0.6)
  Top 0.254: U$18.7 31.11,48.89 30.8,48.57 30.33,48.57 29.85,48.09 29.85,46.35 30.44,45.76 TP9.P$1 | IC1.21 33.96,22.4 35.17,22.4 35.72,21.86 35.72,21.84 36.29,21.27 36.29,21.24 36.64,20.89 36.64,20.29 36.61,20.29 35.93,19.62 35.93,19.58 R23.2 | TP9.P$1 | TP9.P$1 34.33,45.76 v34.64,45.45 | IC1.21 | v33.63,36.02 33.63,32.97 v32.84,32.18 | v33.49,28.8 33.08,28.39 33.02,28.39 32.94,28.31 32.94,22.55 33.11,22.38 IC1.21
  Bottom 0.254: v34.64,45.45 34.64,42.6 33.54,41.5 33.54,36.11 v33.63,36.02 | v32.84,32.18 32.84,28.97 33.32,28.97 v33.49,28.8
RST#
  Top 0.254: JP1.4 41.73,37.69 41.33,38.09 40.14,38.09 40.06,38.02 40.06,37.99 38.48,36.4 36.83,36.4 | 36.83,36.4 SW1.1 | IC1.7 27.2,19.38 28.62,20.79 28.62,20.8 28.78,20.96 29.72,20.96 30.41,21.64 30.41,23.23 31.2,24.02 31.2,24.74 31.32,24.86 31.32,28.45 31.31,28.45 31.43,28.56 31.43,28.57 31.5,28.64 33.35,30.49 36.6,30.49 R3.1 36.58,30.51 C13.1 36.83,33.3 36.83,36.4
RST-IMU  (via drill 0.6)
  Top 0.254: GND.11 43.43,45.21 43.8,44.83 R35.1 43.8,40.66 TP7.P$1 45.17,40.64 v45.18,40.63 | 30.72,18.16 IC1.14 30.69,19.24 v30.34,19.59
  Bottom 0.254: v45.18,40.63 46.17,40.63 47.95,38.85 49.33,37.47 49.33,17.69 48.85,17.21 30.25,17.21 30.25,19.51 v30.34,19.59
RST-WIFI  (via drill 0.6)
  Top 0.254: v37.54,19.4 37.55,19.53 41.67,19.53 TP6.P$1 | IC1.20 35.02,21.88 35.76,21.14 v35.76,20.58 | X1.1 2.63,50.85 v4.25,49.24 | v45.16,14.19 45.16,15.79 44.66,16.3 44.66,17.25 43.76,18.14 43.76,18.16 42.15,19.76 TP6.P$1 | R36.2 45.5,18.73 45.28,18.95 v45.28,19.46 | TP6.P$1 41.91,20.23 42.01,20.33 43.14,20.33 v43.24,20.23
  Bottom 0.254: v37.54,19.4 36.71,19.39 36.71,19.63 v35.76,20.58 | v4.25,49.24 4.25,49.08 5.96,47.36 5.96,35.74 3.59,33.37 3.59,1.92 4.23,1.29 18.09,1.29 18.69,1.89 19.15,1.89 23.78,6.52 23.78,11.08 26.67,13.97 36.58,13.97 39.97,10.57 39.97,7.96 44.81,3.12 47.43,3.12 47.46,3.08 47.53,3.08 48.26,3.81 48.26,7.93 45.27,10.92 45.27,14.07 v45.16,14.19 | v43.24,20.23 44.45,19.01 44.83,19.01 v45.28,19.46
RX-WIFI  (via drill 0.6)
  Top 0.254: X1.16 17.2,50.85 18.75,49.31 18.75,47.29 TP2.P$1 19.68,46.32 v20.9,45.11 | v26.01,21.38 27.32,21.38 28.28,22.34 28.69,22.34 v29.48,23.12 | v33.13,19.49 33.79,19.49 33.94,19.64 IC1.17
  Bottom 0.254: v20.9,45.11 20.9,43.45 19.2,41.76 11.89,41.76 11.7,41.56 11.66,41.56 8.04,37.94 8.04,34.47 6.08,32.51 6.08,13.83 5.62,13.37 5.62,8.4 6.81,7.2 13.58,7.2 16.7,10.32 20.05,10.32 20.28,10.55 20.35,10.55 25.24,15.45 25.24,19.68 24.9,20.03 24.9,20.26 v26.01,21.38 | v33.13,19.49 33.11,19.47 32.57,19.47 31.98,20.06 31.76,20.06 30.17,21.65 30.17,22.88 29.9,23.16 29.51,23.16 v29.48,23.12
SCL-IMU  (via drill 0.6 pad 0.25)
  Top 0.254: GND.19 46.95,48.38 47.42,48.85 48.69,48.85 49.17,48.37 49.17,36.47 v46.99,34.29 | R11.1 43.52,25.48 42.64,25.48 v41.97,26.14 41.73,26.39 IC1.29 | v47.61,28.17 48.49,28.17 TP4.P$1
  Bottom 0.254: v46.99,34.29 46.99,28.71 | 46.99,28.71 44.54,28.71 v41.97,26.14 | 46.99,28.71 47.07,28.71 v47.61,28.17
SDA-IMU  (via drill 0.6 pad 0.25)
  Top 0.254: GND.20 46.8,49.19 47.19,49.58 49,49.58 49.82,48.66 49.82,31.5 TP3.P$1 45.68,30.48 v45.62,30.42 | R12.1 42.12,27.94 | 42.12,27.94 41.52,27.35 41.52,27.33 41.09,26.89 IC1.30 | v41.7,29.11 41.7,28.36 42.12,27.94
  Bottom 0.254: v45.62,30.42 43.01,30.42 v41.7,29.11
TX-WIFI  (via drill 0.6)
  Top 0.254: X1.15 17.52,48.85 17.83,48.55 17.84,48.55 18.15,48.24 18.15,45.35 TP1.P$1 19.61,43.81 v18.63,42.84 | v26.13,19.99 27.05,19.99 28.52,21.46 29,21.46 v29.33,21.79 | v32.83,18.1 31.72,18.1 IC1.16
  Bottom 0.254: v18.63,42.84 11.17,42.84 6.96,38.64 6.96,34.94 4.96,32.94 4.96,7.66 6.16,6.47 14.2,6.47 16.97,9.24 20.54,9.24 26.48,15.18 26.48,19.65 v26.13,19.99 | v32.83,18.1 32.13,18.8 32.13,19.07 31.89,19.31 31.87,19.31 31.57,19.61 31.55,19.61 30.7,20.46 29.86,20.46 29.76,20.35 29.31,20.35 29.05,20.61 29.05,20.8 29.33,21.08 v29.33,21.79
V+  (via drill 0.6)
  Top 0.254: C24.1 13.45,33.92 IC2.1 | IC3.10 IC3.9 14.38,5.83 13.72,5.83 12.83,6.72 11.8,6.72 10.91,7.62 10.91,8.2 10.75,8.35 10.75,10 11.42,10.66 C27.1
  Top 0.813: CN1.2 7.35,26.4 | 7.35,26.4 7.62,26.67 7.62,27.44 7.55,27.51 7.55,27.55 6.37,28.73 6.37,35.1 6.98,35.71 12.31,35.71 12.85,35.18 12.85,35.14 13.23,34.76 13.23,33.7 IC2.1 | 7.35,26.4 7.35,26.17 v8.36,25.16 | v9.87,10.65 13.32,10.65 C27.1
  Bottom 0.813: v8.36,25.16 8.36,12.15 v9.87,10.65
VBACKUP
  Top 0.254: IC1.1 23.85,17.79 C8.1 21.42,16.6 20.57,16.6 20.12,16.15 20.12,16.12 20.1,16.1 20.1,14.79 19.01,13.7 D7.3
VCAP1
  Top 0.254: C19.2 35.85,27.94 35.32,27.41 33.97,27.41 IC1.31
VCAP2
  Top 0.254: C20.2 23.5,35.21 24.65,34.05 24.65,30.17 IC1.47
VCC-WIFI  (via drill 0.6 pad 0.25)
  Top 0.254: U$18.14 26.04,56.84 25.09,57.78 C30.1 24.8,57.8 24.8,58.85 24.7,58.94 22.48,58.94 21.22,57.89 C32.1 21.27,57.83 21.27,58.77 20.92,59.02 18.61,59.02 18,58.52 v18,58.13 | X1.8 3.83,36.85 7.62,40.64 7.62,45.81 v13.37,51.57
  Bottom 0.254: v18,58.13 18.75,58.13 19.88,57 19.88,52.76 18.7,51.58 13.39,51.58 v13.37,51.57
VDD-IMU  (via drill 0.6 pad 0.25)
  Top 0.254: GND.3 40.65,47.88 39.91,48.62 39.91,50.31 v39.92,50.33 39.93,50.32 40.9,50.32 41.43,49.79 GND.28 | 24.76,53.69 23.78,52.7 C17.1 20.95,52.69 20.95,51.88 20.05,50.98 C29.1 | 24.76,53.69 U$18.15 | v26.07,52.92 25.53,52.92 24.76,53.69
  Bottom 0.254: v39.92,50.33 37.29,52.95 26.1,52.95 v26.07,52.92
VDD-MMA  (via drill 0.6, 0.6 pad 0.25)
  Top 0.254: U$18.11 29.83,55.05 29.83,53.49 31.25,52.07 C16.1 34.02,51.19 C26.1 34.02,48.52 v34.29,48.26 | C14.1 7.92,22.44 8.77,21.59 9.6,21.59 U$1.P$3 10.71,21.57 11.21,22.08 U$1.P$9 | U$1.P$9 12.73,22.07 C15.1 | U$1.P$9 11.29,22.07 10.84,22.52 10.84,22.87 10.16,23.55 9.79,23.55 9.19,24.14 9.19,25.63 8.97,25.86 8.92,25.86 8.42,26.36 8.42,29.85 v8.48,29.9
  Bottom 0.254: v34.29,48.26 27.58,41.55 24.35,41.55 20,37.19 20,36.52 14.9,31.42 10.1,31.42 8.58,29.9 v8.48,29.9
VUSB  (via drill 0.6)
  Top 0.254: IC3.2 IC3.1 18,4.73 13.82,4.73 | LED1.A 7.42,12.7 v6.92,12.7 | v7.69,10.73 7.69,10.71 10.42,7.98 10.42,7.1 10.5,7.01 | U2.5 12.34,6.22 13.82,4.73 | C25.1 29.85,5.72 26.52,2.39 19.01,2.39 17.9,1.29 14.24,1.29 13.97,1.56 v13.97,2.12 v13.97,2.13 | v13.03,3.92 13.03,3.94 13.82,4.73
  Top 0.305: U1.VBUS 10.5,7.01 10.74,7.01 U2.5
  Top 0.813: CN2.1 8.34,14.88 | 8.34,14.88 D1.A 8.54,14.62 8.35,14.42 8.35,13.01 LED1.A | 8.34,14.88 8.34,16.26 D6.A
  Bottom 0.254: v6.92,12.7 6.92,11.5 v7.69,10.73 | v13.97,2.13 13.97,3.05 v13.03,3.92